# EAGLE board EX Analog (EAGLE 7.2.0)
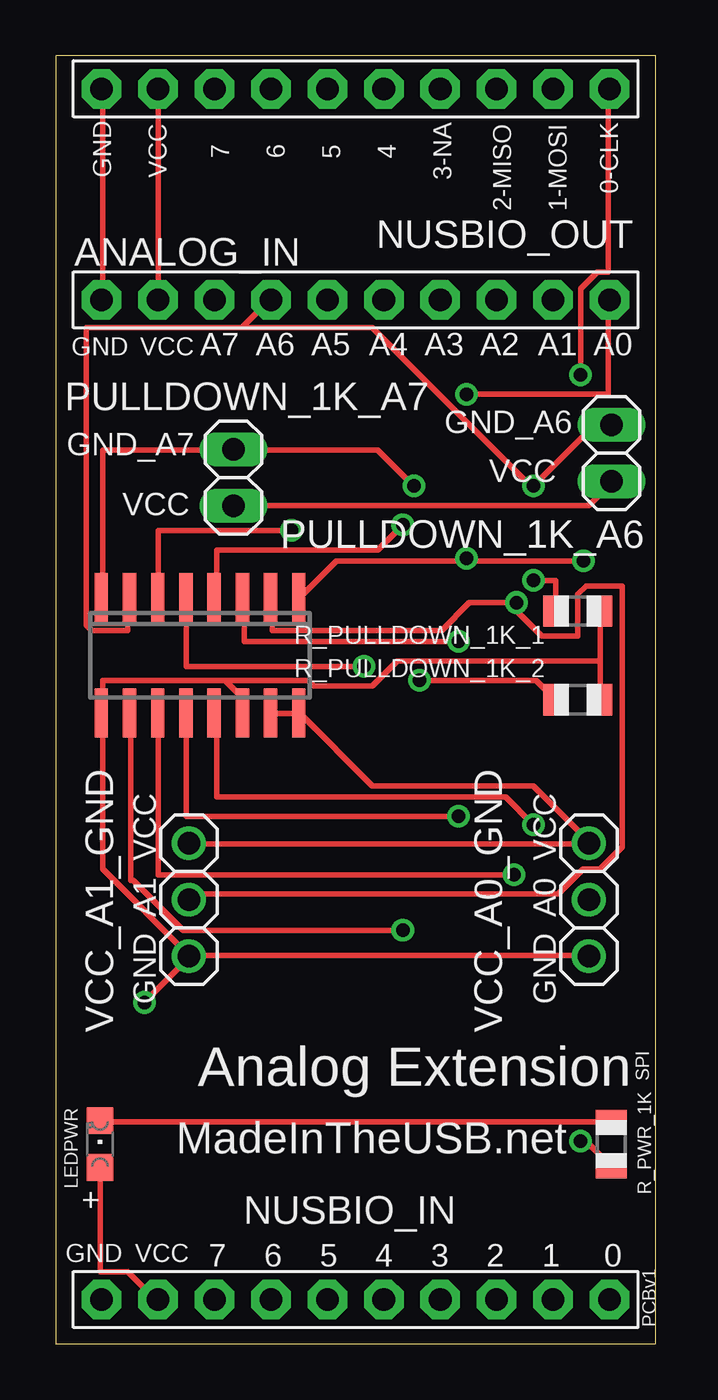
[diagram p0: board, top side]
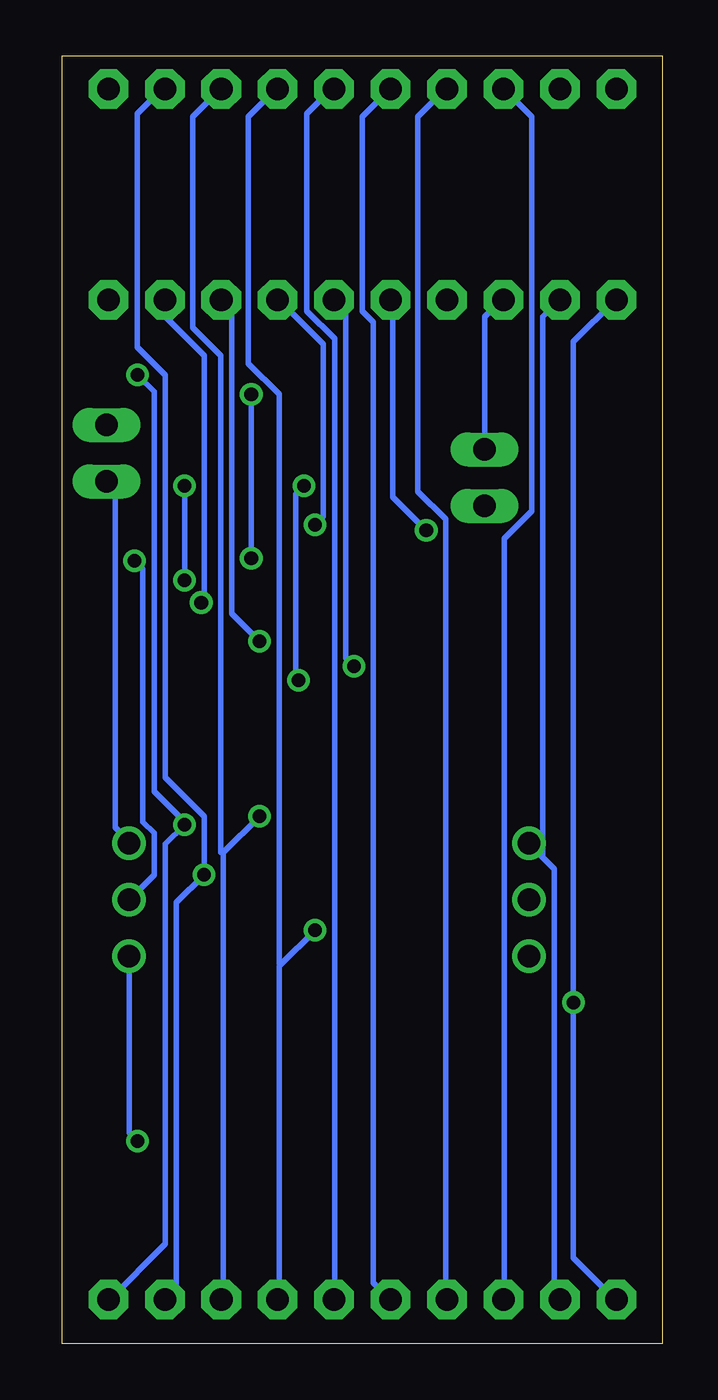
[diagram p1: board, bottom side, seen from below]

Size 27 x 58 mm. Coordinates in mm from the lower left corner, seen from the top.
Outline: 0,0 27,0 27,58 0,58 0,0
Copper layers (1*16): Top 0.035mm / dielectric 1.5mm / Bottom 0.035mm
Design rules "default": minimum track width 10mil, minimum drill 24mil, track to track 8mil, track to pad 8mil, pad to pad 8mil, via to via 8mil, smd to smd 8mil, copper to edge 40mil, drill to drill 8mil, minimum pad ring 10mil, minimum via ring 8mil, stop-mask expansion 4mil, vias tented up to drill 0mil, thermal gap 10mil

## Footprints (pad centres in the part's own frame; a part is rotated, then mirrored left to right if it is on the bottom)
1X10-BIG = drill 1.016 pad 1.778 octagon: 1 -11.43,0; 2 -8.89,0; 3 -6.35,0; 4 -3.81,0; 5 -1.27,0; 6 1.27,0; 7 3.81,0; 8 6.35,0; 9 8.89,0; 10 11.43,0
CHIPLED_0805 = smd 1.2 x 1.2: A 0,-1.05; C 0,1.05
1X02 = drill 1.016 long: 1 -1.27,0; 2 1.27,0
R0805 = smd 1.1 x 1.4: 1 -1,0; 2 1,0
SO16 = smd 0.6 x 2.2: 1 -4.445,-2.6; 2 -3.175,-2.6; 3 -1.905,-2.6; 4 -0.635,-2.6; 5 0.635,-2.6; 6 1.905,-2.6; 7 3.175,-2.6; 8 4.445,-2.6; 9 4.445,2.6; 10 3.175,2.6; 11 1.905,2.6; 12 0.635,2.6; 13 -0.635,2.6; 14 -1.905,2.6; 15 -3.175,2.6; 16 -4.445,2.6
1X03 = drill 1.016: 1 -2.54,0; 2 0,0; 3 2.54,0

## Placement (x,y rotation side)
ANALOG_IN  PINHD-1X10  [1X10-BIG]  13.5,47 180 top
LEDPWR  [CHIPLED_0805]  2,9 0 top
NUSBIO_IN  PINHD-1X10  [1X10-BIG]  13.5,2 180 top
NUSBIO_OUT  PINHD-1X10  [1X10-BIG]  13.5,56.5 180 top
PULLDOWN_1K_A6  [1X02]  25.02,40.1 90 top
PULLDOWN_1K_A7  [1X02]  8,39 90 top
R_PULLDOWN_1K_1  [R0805]  23.5,33 0 top
R_PULLDOWN_1K_2  [R0805]  23.5,29 0 top
R_PWR_1K  [R0805]  25,9 90 top
U$1  MCP3008SL  [SO16]  6.5,31 180 top
VCC_A0_GND  [1X03]  24,20 270 top
VCC_A1_GND  [1X03]  6,20 270 top

## Library data of the parts
ANALOG_IN LEDPWR NUSBIO_IN NUSBIO_OUT R_PULLDOWN_1K_1 R_PULLDOWN_1K_2 R_PWR_1K VCC_A0_GND VCC_A1_GND = adafruit
PULLDOWN_1K_A6 PULLDOWN_1K_A7 = pinhead
U$1 = MCP3008

## Nets
GND: ANALOG_IN.10 NUSBIO_IN.10 NUSBIO_OUT.10 R_PULLDOWN_1K_1.2 R_PULLDOWN_1K_2.2 R_PWR_1K.1 U$1.9 U$1.14 VCC_A0_GND.3 VCC_A1_GND.3
N$1: NUSBIO_IN.1 NUSBIO_OUT.1 U$1.13
N$2: NUSBIO_IN.2 NUSBIO_OUT.2 U$1.11
N$3: NUSBIO_IN.3 NUSBIO_OUT.3 U$1.12
N$4: NUSBIO_IN.5 NUSBIO_OUT.5
N$5: NUSBIO_IN.4 NUSBIO_OUT.4 U$1.10
N$6: LEDPWR.C R_PWR_1K.2
N$7: NUSBIO_IN.6 NUSBIO_OUT.6
N$8: NUSBIO_IN.7 NUSBIO_OUT.7
N$9: NUSBIO_IN.8 NUSBIO_OUT.8
N$10: ANALOG_IN.1 U$1.1 VCC_A0_GND.2
N$11: ANALOG_IN.2 U$1.2 VCC_A1_GND.2
N$12: ANALOG_IN.3 U$1.3
N$13: ANALOG_IN.4 U$1.4
N$14: ANALOG_IN.6 U$1.6
N$15: ANALOG_IN.7 PULLDOWN_1K_A6.2 R_PULLDOWN_1K_1.1 U$1.7
N$16: ANALOG_IN.8 PULLDOWN_1K_A7.2 R_PULLDOWN_1K_2.1 U$1.8
N$17: ANALOG_IN.5 U$1.5
N$18: ANALOG_IN.9 LEDPWR.A NUSBIO_IN.9 NUSBIO_OUT.9 PULLDOWN_1K_A6.1 PULLDOWN_1K_A7.1 U$1.15 U$1.16 VCC_A0_GND.1 VCC_A1_GND.1

## Tracks (layer width: path | path; a pad name or v marks a point on that pad's centre or on a via)
GND  (via drill 0.61)
  Top 0.254: ANALOG_IN.10 2.12,47 2.12,56.5 NUSBIO_OUT.10 | R_PWR_1K.1 23.88,9.12 v23.62,9.12 | R_PULLDOWN_1K_1.2 24.5,30.75 | 24.5,30.75 R_PULLDOWN_1K_2.2 | 7.62,29.88 2.12,29.88 2.12,28.5 U$1.9 2.12,28.38 2.12,21.38 6,17.5 VCC_A1_GND.3 | 7.62,29.88 8.38,29.12 8.38,28.5 U$1.14 | 24.5,30.75 15.38,30.75 14.25,29.62 11.62,29.62 11.38,29.88 7.62,29.88 | v4,15.38 6,17.38 VCC_A1_GND.3 | VCC_A0_GND.3 24,17.5 6.12,17.5 VCC_A1_GND.3
  Bottom 0.254: v23.62,9.12 24,9.5 VCC_A0_GND.3 | NUSBIO_IN.10 2.12,2 4,3.88 v4,15.38 4,45.12 2.12,47 ANALOG_IN.10
N$1  (via drill 0.61)
  Top 0.254: v21.5,23.38 20.25,24.62 7.25,24.62 7.25,28.38 U$1.13 | v23.62,43.62 23.62,47.5 24.38,48.25 24.88,48.25 24.88,56.5 NUSBIO_OUT.1
  Bottom 0.254: NUSBIO_IN.1 24.88,2 22.38,4.5 22.38,22.5 v21.5,23.38 21.5,23.5 22.88,24.88 22.88,42.88 v23.62,43.62
N$2  (via drill 0.61)
  Top 0.254: v20.62,21.12 4.62,21.12 4.62,28.38 U$1.11
  Bottom 0.254: NUSBIO_IN.2 22.38,2 21.88,2.5 21.88,19.88 v20.62,21.12 20.62,23.75 22.38,25.5 22.38,43.62 23.62,44.88 23.62,55.38 22.5,56.5 NUSBIO_OUT.2
N$3  (via drill 0.61)
  Top 0.254: v18.12,23.75 5.88,23.75 5.88,28.38 U$1.12
  Bottom 0.254: 19.75,22.12 v18.12,23.75 | 19.75,22.12 19.75,2 NUSBIO_IN.3 | NUSBIO_OUT.3 19.88,56.5 21.12,55.25 21.12,45.75 19.88,44.5 19.88,22.12 19.75,22.12
N$4
  Bottom 0.254: NUSBIO_IN.5 14.75,2 14.75,45.25 16,46.5 16,55.38 14.88,56.5 NUSBIO_OUT.5
N$5  (via drill 0.61)
  Top 0.254: v15.62,18.62 5.75,18.62 3.5,20.88 3.38,20.88 3.38,28.38 U$1.10
  Bottom 0.254: 17.19,17.06 17.25,17 17.25,2 NUSBIO_IN.4 | 17.19,17.06 v15.62,18.62 | NUSBIO_OUT.4 17.38,56.5 18.62,55.25 18.62,44.12 17.25,42.75 17.25,17.12 17.19,17.06
N$6
  Top 0.254: R_PWR_1K.2 2,10 LEDPWR.C
N$7
  Bottom 0.254: NUSBIO_IN.6 12.25,2 13,2.75 13,46 13.5,46.5 13.5,55.25 12.25,56.5 NUSBIO_OUT.6
N$8
  Bottom 0.254: NUSBIO_IN.7 9.75,2 9.75,37.12 11,38.38 11,55.25 9.75,56.5 NUSBIO_OUT.7
N$9
  Bottom 0.254: NUSBIO_IN.8 7.12,2 7.12,36.25 5.88,37.5 5.88,55.25 7.12,56.5 NUSBIO_OUT.8
N$10  (via drill 0.61)
  Top 0.254: v23.75,35.25 18.5,35.25 | 18.5,35.25 12.62,35.25 11,33.62 U$1.1 | v18.5,42.75 24.88,42.75 24.88,47 ANALOG_IN.1 | v18.5,35.38 18.5,35.25
  Bottom 0.254: v23.75,35.25 23.38,34.88 23.38,23.5 22.88,23 22.88,21.12 VCC_A0_GND.2 | v18.5,35.38 v18.5,42.75
N$11  (via drill 0.61)
  Top 0.254: U$1.2 9.75,33.5 9.75,32.12 17.38,32.12 18.62,33.38 v20.75,33.38 20.5,33.25 21.88,31.88 23.5,31.88 23.5,33.75 23.88,34.12 25.5,34.12 25.5,22.38 24.5,21.38 23.75,21.38 22.62,20.25 6.25,20.25 VCC_A1_GND.2
  Bottom 0.254: v20.75,33.38 20.62,33.5 20.62,44.5 22.38,46.25 22.38,47 ANALOG_IN.2
N$12  (via drill 0.61)
  Top 0.254: v18.12,31.62 8.5,31.62 8.5,33.5 U$1.3
  Bottom 0.254: v18.12,31.62 19.38,32.88 19.38,46.62 19.75,47 ANALOG_IN.3
N$13  (via drill 0.61)
  Top 0.254: v15.62,36.88 14.5,35.75 7.25,35.75 7.25,33.62 U$1.4
  Bottom 0.254: v15.62,36.88 15.25,37.25 15.25,45 17.25,47 ANALOG_IN.4
N$14  (via drill 0.61)
  Top 0.254: v10.62,36.62 4.62,36.62 4.62,33.62 U$1.6
  Bottom 0.254: v10.62,36.62 12.12,38.12 12.12,47 ANALOG_IN.6
N$15  (via drill 0.61)
  Top 0.254: R_PULLDOWN_1K_1.1 22.5,34.38 v21.5,34.38 | PULLDOWN_1K_A6.2 25,41.25 24.12,41.25 v21.5,38.62 21.38,38.62 14.25,45.75 8.38,45.75 | 8.38,45.75 1.38,45.75 1.38,32.38 1.62,32.12 3.25,32.12 3.25,33.5 U$1.7 | 8.38,45.75 9.62,47 ANALOG_IN.7
  Bottom 0.254: v21.5,38.62 v21.5,34.38
N$16  (via drill 0.61)
  Top 0.254: R_PULLDOWN_1K_2.1 21.62,29.88 v16.38,29.88 | v16.12,38.62 14.5,40.25 8,40.25 PULLDOWN_1K_A7.2 7.88,40.25 2.12,40.25 2.12,33.62 U$1.8
  Bottom 0.254: v16.38,29.88 16.5,30 16.5,38.25 v16.12,38.62 | PULLDOWN_1K_A7.2 8,46.25 7.25,47 ANALOG_IN.8
N$17  (via drill 0.61)
  Top 0.254: v13.88,30.5 5.88,30.5 5.88,33.5 U$1.5
  Bottom 0.254: v13.88,30.5 14.25,30.88 14.25,46.5 14.75,47 ANALOG_IN.5
N$18
  Top 0.254: PULLDOWN_1K_A7.1 8,37.75 24,37.75 25,38.75 PULLDOWN_1K_A6.1 | ANALOG_IN.9 4.62,47 4.62,56.5 NUSBIO_OUT.9 | LEDPWR.A 2,3.25 3.25,3.25 4.5,2 NUSBIO_IN.9 | U$1.15 9.75,28.38 10.88,28.38 U$1.16 11,28.38 14.25,25.12 21.5,25.12 24,22.62 VCC_A0_GND.1 23.88,22.5 6,22.5 VCC_A1_GND.1
  Bottom 0.254: 5.44,21.94 6,22.5 VCC_A1_GND.1 | 5.44,21.94 4.88,21.38 4.88,2.25 4.62,2 NUSBIO_IN.9 | ANALOG_IN.9 4.62,47 5.38,46.25 5.38,22 5.44,21.94 | PULLDOWN_1K_A6.1 25,38.75 24.62,38.38 24.62,23.25 24,22.62 VCC_A0_GND.1

## Text on the board
tNames: 3-NA | 0-CLK | 7 | 6 | 5 | 4 | GND | VCC | 2-MISO | 1-MOSI | GND | VCC | A7 | A6 | A5 | A4 | A3 | A2 | A1 | A0 | GND_A6 | GND_A7 | VCC | VCC | VCC | VCC | A1 | A0 | GND | GND | Analog Extension | SPI | MadeInTheUSB.net | + | GND | VCC | 7 | 6 | 5 | 4 | 3 | 2 | 1 | 0 | PCBv1